# Altium PCB LM317.PcbDoc
Units mm, origin at the board's own origin, x right, y up, seen from the top; angles counter-clockwise.
Board outline 26 x 17 mm, 2 copper layers (Top Layer, Bottom Layer); 6 components, 5 nets, 19 pads, 0 vias.
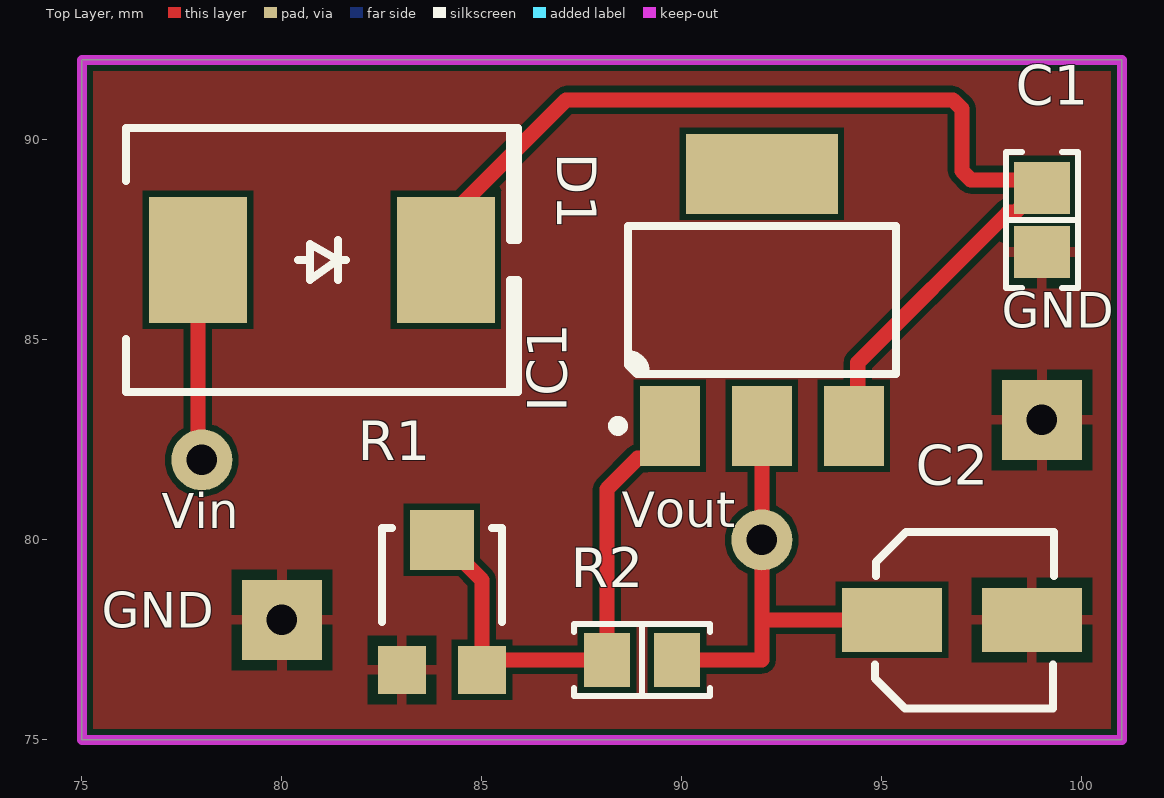
[diagram p0: Top Layer view]
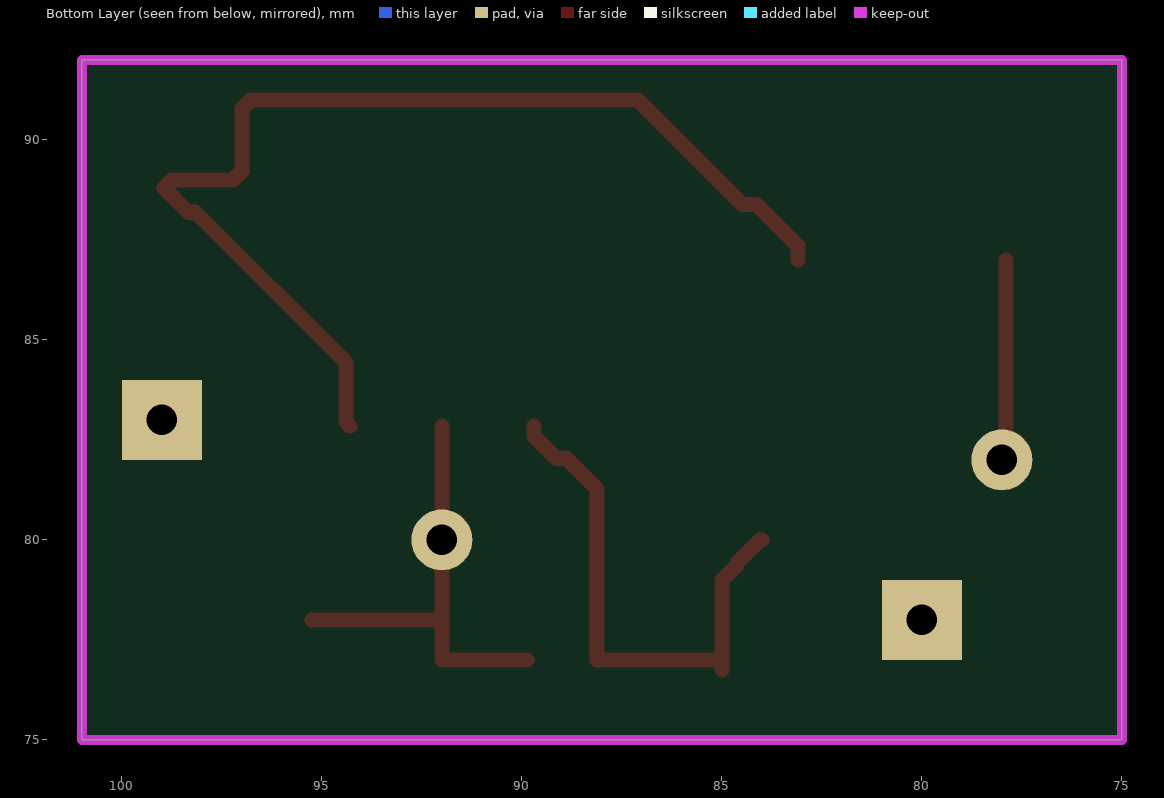
[diagram p1: Bottom Layer view, seen from below]
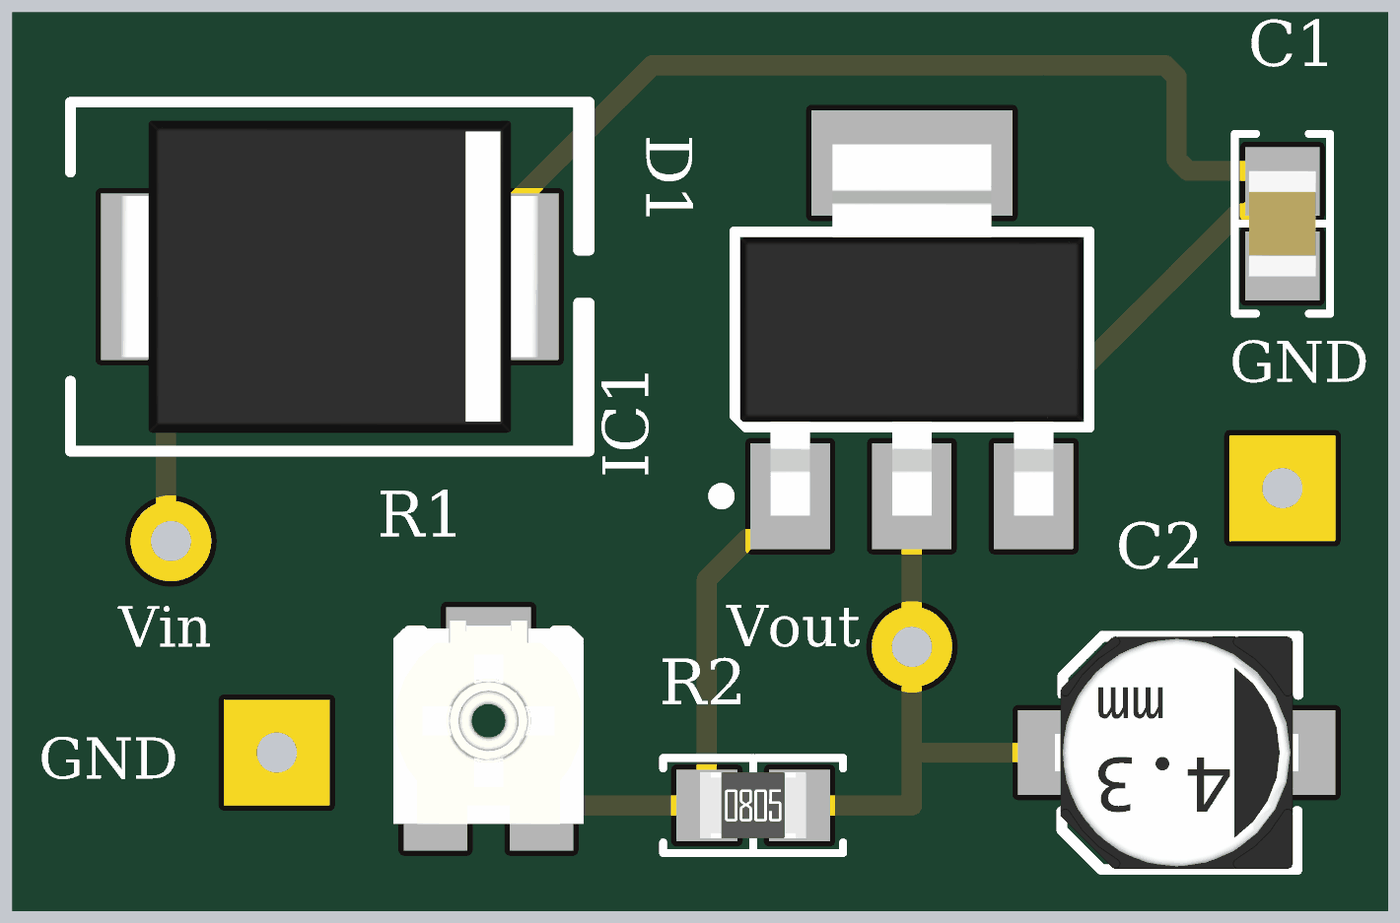
[diagram p2: 3D render of the assembled board from above, using the file's embedded part models]

## Layer stack, top to bottom
Top Solder: solder mask 0.0102, Solder Resist, Dk 3.5
Top Layer: signal copper 0.0356
Dielectric 1: dielectric 0.32, FR-4, Dk 4.8
Bottom Layer: signal copper 0.0356
Bottom Solder: solder mask 0.0102, Solder Resist, Dk 3.5

## Board outline
75,75 75,92 101,92 101,75

## Design rules (kind name [scope] priority, off if disabled: settings)
Clearance [All] p1: gap=0.152 ignorepadtopadclearanceinfootprint=FALSE
PolygonConnect [All] p1: connectstyle=Relief reliefconductorwidth=0.254 reliefentries=4 polygonreliefangle="90 Angle" airgapwidth=0.254
RoutingVias [All] p1: holewidth=0.5 width=0.8 viastyle="Through Hole" minholewidth=0.3 minwidth=0.5 maxholewidth=1 maxwidth=2
SolderMaskExpansion [All] p1: expansion=0.102 istentingtop=FALSE
Width [All] p1: maxlimit=3 minlimit=0.152 preferedwidth=0.5
30 further rules are at their usual default settings.

## Components (designator, comment, footprint, x,y, rotation, side; value= is the part's Value field where it differs from the comment)
C1 "0.1µF" "CAP 0805_2012" 99,88 r90 top
C2 "1µF" "CAP ALSMD 4.3MM H5.4MM" 97,78 r0 top
D1 "SURS8360T3G" "DO214AB SMC" 81,87 r0 top
IC1 "LM317EMPX/NOPB" "TI SOT-223 DCY" 92,86 r90 top
R1 "10 kOhms" "POT BOURNS TRIMPOT TC33" 84,78.55 r0 top
R2 "330" "RES 0805_2012" 89,77 r0 top

## Footprints (in the part's own frame and the unit in brackets; to place one, negate y for a bottom-side part, rotate by r counter-clockwise, add the part's x,y. Pads: shape width x height; smd on the part's side, far side on the other; paste and mask are expansions set on the pad)
"CAP 0805_2012" [mm] "Chip Capacitor, 2-Leads, Body 2.00x1.20mm, IPC Medium Density"
  rect 1.3x1.4 smd: 1(-0.8,0) 2(0.8,0)
  silkscreen extent -1.7,-0.9 1.7,0.9, body extent -1,-0.64 1,0.64, height 1.26
"CAP ALSMD 4.3MM H5.4MM" [mm] "Aluminum Electrolytic Capacitor, Body 4.30x4.30x5.40mm, IPC Low Density"
  rect 2.5x1.6 smd: 1(-1.75,0) 2(1.75,0)
  silkscreen extent -2.17,-2.21 2.3,2.2, body extent -2.3,-2.2 2.3,2.2, height 5.4
"DO214AB SMC" [mm] "Molded Diode, 2-Leads, Body 6.85x5.90mm, IPC Medium Density"
  rect 2.45x3.15 smd: 1(-3.1,0) 2(3.1,0)
  silkscreen extent -4.9,-3.3 4.9,3.3, body extent -3.97,-2.95 3.97,2.95, height 2.6
"POT BOURNS TRIMPOT TC33" [mm] "Bourns Trimpot TC33X-1 - Open Frame 3mm x 3.8mm x 1.2mm"
  rect 1.2x1.2 smd: 1(-1,-1.8) 3(1,-1.8)
  rect 1.6x1.5 smd: 2(0,1.45)
  silkscreen extent -1.5,-0.6 1.5,1.75, body extent -1.8,-1.91 1.8,1.95, height 1.15
"RES 0805_2012" [mm] "Chip Resistor, 2-Leads, Body 2.00x1.25mm, IPC Medium Density"
  rect 1.15x1.35 smd: 1(-0.875,0) 2(0.875,0)
  silkscreen extent -1.7,-0.9 1.7,0.9, body extent -1,-0.62 1,0.63, height 0.6
"TI SOT-223 DCY" [mm] "SOT223, 4-Leads, Body 6.50x7.00mm (avg), Pitch 2.30mm, IPC Medium Density"
  rect 2x1.5 smd: 1(-3.15,2.3) 2(-3.15,0) 3(-3.15,-2.3)
  rect 2x3.8 smd: 4(3.15,0)
  silkscreen extent -3.27,-3.35 1.85,3.72, body extent -3.52,-3.25 3.5,3.25, height 1.8

## Part data
C1: library part CC0805MRX7R9BB104, "CAP CER 0.1UF 50V X7R 0805", Device Package="0805 (2012 Metric)", Manufacturer=Yageo, Operating Temperature="-55°C ~ 125°C", Supplier Part Number 1=311-4351-1-ND, Temperature Coefficient=X7R, Tolerance=±20%, Voltage - Rated=50V, Applications="General Purpose", Capacitance=0.1µF, ComponentLink1Description=Datasheet, ComponentLink1URL=https://www.yageo.com/upload/media/product/productsearch/datasheet/mlcc/UPY-GPHC_X7R_6.3V-to-50V_18.pdf, ComponentLink2Description="DigiKey Link", ComponentLink2URL=http://digikey.com/product-detail/en/yageo/CC0805MRX7R9BB104/311-4351-1-ND/8025440, LastUpdated="2.9.2020 01:04:42", Lifecycle Status=Active, Minimum Order=1, Mounting Type="Surface Mount, MLCC", Package / Case="0805 (2012 Metric)", Packaging=TapeAndReel, Part Number=CC0805MRX7R9BB104, Part Status=Active, PartId=2475, Price=0.02, Series=CC, Size / Dimension="0.079\" L x 0.049\" W (2.00mm x 1.25mm)", Supplier 1=DigiKey, Thickness (Max)="0.037\" (0.95mm)"
C2: library part UZT1H010MCL1GB, "CAP ALUM 1UF 20% 50V SMD", Device Package="Radial, Can - SMD", Lifetime @ Temp.="1000 Hrs @ 105°C", Manufacturer=Nichicon, Operating Temperature="-40°C ~ 105°C", Ripple Current @ High Frequency="8.1mA @ 10kHz", Ripple Current @ Low Frequency="5.4mA @ 120Hz", Supplier Part Number 1=493-10179-1-ND, Tolerance=±20%, Voltage - Rated=50V, Applications="General Purpose", Capacitance=1µF, ComponentLink1Description=Datasheet, ComponentLink1URL=http://nichicon-us.com/english/products/pdfs/e-uzt.pdf, ComponentLink2Description="DigiKey Link", ComponentLink2URL=http://digikey.com/product-detail/en/nichicon/UZT1H010MCL1GB/493-10179-1-ND/3984024, Height - Seated (Max)="0.181\" (4.60mm)", LastUpdated="2.9.2020 01:18:27", Lifecycle Status=Active, Minimum Order=1, Mounting Type="Surface Mount", Package / Case="Radial, Can - SMD", Packaging=TapeAndReel, Part Number=UZT1H010MCL1GB, Part Status=Active, PartId=8521, Price=0.17, Series=UZT, Size / Dimension="0.157\" Dia (4.00mm)", Supplier 1=DigiKey, Surface Mount Land Size="0.169\" L x 0.169\" W (4.30mm x 4.30mm)"
D1: "DIODE GEN PURP 600V 3A SMC", Current - Average Rectified (Io)=3A, Current - Reverse Leakage @ Vr="10µA @ 600V", Manufacturer="ON Semiconductor", Operating Temperature - Junction="-65°C ~ 175°C", Package / Case="DO-214AB, SMC", Supplier Device Package=SMC, Supplier Part Number 1=SURS8360T3GOSCT-ND, Voltage - DC Reverse (Vr) (Max)=600V, Voltage - Forward (Vf) (Max) @ If="1.25V @ 3A", ComponentLink1Description=Datasheet, ComponentLink1URL=http://www.onsemi.com/pub/Collateral/MURS320T3-D.PDF, ComponentLink2Description="DigiKey Link", ComponentLink2URL=http://digikey.com/product-detail/en/on-semiconductor/SURS8360T3G/SURS8360T3GOSCT-ND/9087771, Diode Type=Standard, LastUpdated="2.9.2020 01:18:57", Lifecycle Status=Active, Minimum Order=1, Mounting Type="Surface Mount", Packaging=TapeAndReel, Part Number=SURS8360T3G, Part Status=Active, PartId=348, Price=0.30, Reverse Recovery Time (trr)=75ns, Series=-, Speed="Fast Recovery =< 500ns, > 200mA (Io)", Supplier 1=DigiKey
IC1: "IC REG LIN POS ADJ 1.5A SOT223-4", Current - Output=1.5A, Device Package="TO-261-4, TO-261AA", Manufacturer="Texas Instruments", Operating Temperature="0°C ~ 125°C", Supplier Device Package=SOT-223-4, Supplier Part Number 1=LM317EMPX/NOPBTR-ND, Voltage - Output (Max)=37V, Voltage - Output (Min/Fixed)=1.25V, ComponentLink1Description=Datasheet, ComponentLink1URL=http://www.ti.com/general/docs/suppproductinfo.tsp?distId=10&gotoUrl=http%3A%2F%2Fwww.ti.com%2Flit%2Fgpn%2Flm117, ComponentLink2Description="DigiKey Link", ComponentLink2URL=//digikey.com/product-detail/en/texas-instruments/LM317EMPX-NOPB/LM317EMPX-NOPBTR-ND/367000, LastUpdated="9.12.2019 14:53:58", Lifecycle Status=0, Minimum Order=1, Mounting Type="Surface Mount", Number of Regulators=1, Output Configuration=Positive, Output Type=Adjustable, Package / Case="TO-261-4, TO-261AA", Packaging=TapeAndReel, Part Number=LM317EMPX/NOPB, Part Status=Active, Price=0.50, Protection Features="Over Current, Over Temperature, Short Circuit", PSRR="80dB ~ 65dB (120Hz)", Series=-, Supplier 1=DigiKey, Voltage - Input (Max)=37V
R1: library part TC33X-2-103G, "TRIMMER 10K OHM 0.1W J LEAD TOP", Manufacturer="Bourns Inc.", Power (Watts)="0.1W, 1/10W", Resistive Material=Cermet, Supplier Part Number 1=TC33X-2-103G-ND, Temperature Coefficient=±250ppm/°C, Tolerance=±25%, Adjustment Type="Top Adjustment", ComponentLink1Description=Datasheet, ComponentLink1URL=https://www.bourns.com/docs/Product-Datasheets/TC33.pdf, ComponentLink2Description="DigiKey Link", ComponentLink2URL=http://digikey.com/product-detail/en/bourns-inc/TC33X-2-103G/TC33X-2-103G-ND/2566880, LastUpdated="30.8.2020 21:01:57", Lifecycle Status=Active, Minimum Order=9000, Mounting Type="Surface Mount", Number of Turns=1, Packaging=TapeAndReel, Part Number=TC33X-2-103G, PartId=68, Price=0.13, Resistance="10 kOhms", Series="Trimpot® TC33 - Open Frame", Size / Dimension="Rectangular - 0.150\" x 0.142\" Face x 0.047\" H (3.80mm x 3.60mm x 1.20mm)", Supplier 1=DigiKey, Termination Style="J Lead"
R2: library part TNPW0805330RDEEA, "RES 330 OHM 0.5% 1/8W 0805", Device Package="0805 (2012 Metric)", Manufacturer="Vishay Dale", Operating Temperature="-55°C ~ 155°C", Power (Watts)="0.2W, 1/5W", Ratings=AEC-Q200, Resistance="330 Ohms", Supplier Device Package=0805, Supplier Part Number 1=541-3919-1-ND, Temperature Coefficient=±25ppm/°C, Tolerance=±0.5%, ComponentLink1Description=Datasheet, ComponentLink1URL=http://www.vishay.com/docs/28758/tnpw_e3.pdf, ComponentLink2Description="DigiKey Link", ComponentLink2URL=http://digikey.com/product-detail/en/vishay-dale/TNPW0805330RDEEA/541-3919-1-ND/7355277, Composition="Thin Film", Features="Anti-Sulfur, Automotive AEC-Q200, Moisture Resistant", Height - Seated (Max)="0.022\" (0.55mm)", LastUpdated="2.9.2020 01:14:55", Lifecycle Status=Active, Minimum Order=1, Number of Terminations=2, Package / Case="0805 (2012 Metric)", Packaging=TapeAndReel, Part Number=TNPW0805330RDEEA, Part Status=Active, PartId=40812, Price=0.05, Series="TNPW e3", Size / Dimension="0.079\" L x 0.049\" W (2.00mm x 1.25mm)", Supplier 1=DigiKey

## Free pads (board coordinates)
  rect 2x2 hole 0.762: GND(80,78) GND(99,83)
  round 1.524 hole 0.762: Vin(78,82) Vout(92,80)

## Nets (pads, with @x,y where several pads share a name; then routed paths per layer and width w, separated by ;. In a path a pad name is that pad's centre, name@x,y a point inside that pad or via, vN(x,y) a via of type N, cw(c..) or ccw(c..) an arc to the next point about the centre after c; other vN are vias at no path point)
GND: C1.1 C2.2 pad.GND R1.1
NetC1_2: C1.2 D1.2 IC1.3 | length 27.5
  Top Layer w0.381: D1.2@83.1,87 83.1,87.35 84.135,88.385 84.484,88.385 87.1,91 96.777,91 97,90.777 97,89.223 97.223,89 98.75,89 98.95,88.8 98.343,88.193 98.158,88.193 94.398,84.433 94.398,82.948 IC1.3
NetR1_2: IC1.1 R1.2 R1.3 R2.1 | length 13.5
  Top Layer w0.381: R1.2 84.05,80 84.61,79.44 84.61,79.39 85,79 R1.3@85,77 ; R1.3 R1.3@85,77 ; IC1.1 89.7,82.6 89.14,82.041 88.89,82.041 88.125,81.275 R2.1 R1.3@85,77
Vin: D1.1 pad.Vin | length 5
  Top Layer w0.381: D1.1 77.9,82.1 pad.Vin
Vout: C2.1 IC1.2 pad.Vout R2.2 | length 11.2
  Top Layer w0.381: R2.2 92,77 92,78 ; IC1.2 pad.Vout 92,78 ; C2.1 92,78
pads on no net: IC1.4

## Polygon pours and split planes (outlines as drawn)
GND on Bottom Layer "GND_L02_P000" (solid, pour order 0): 75,92 101,92 101,75 75,75

## Keep-outs
Keep-Out Layer:
  the board outline again, w0.254

## Silkscreen, mask and mechanical layers (free items; w line width, h text height)
Top Overlay:
  text "GND" at 98,85.01 h1.52
  text "Vin" at 77.001,80.003 h1.5
  text "Vout" at 88.501,80.012 h1.52
  text "GND" at 75.5,77.51 h1.52